# Altium PCB SSFocuser-B-DRV8825-KCTW.PcbDoc
Units mm, origin at the board's own origin, x right, y up, seen from the top; angles counter-clockwise.
Board outline 40 x 49 mm, 2 copper layers (Top Layer, Bottom Layer); 45 components, 39 nets, 212 pads, 39 vias.
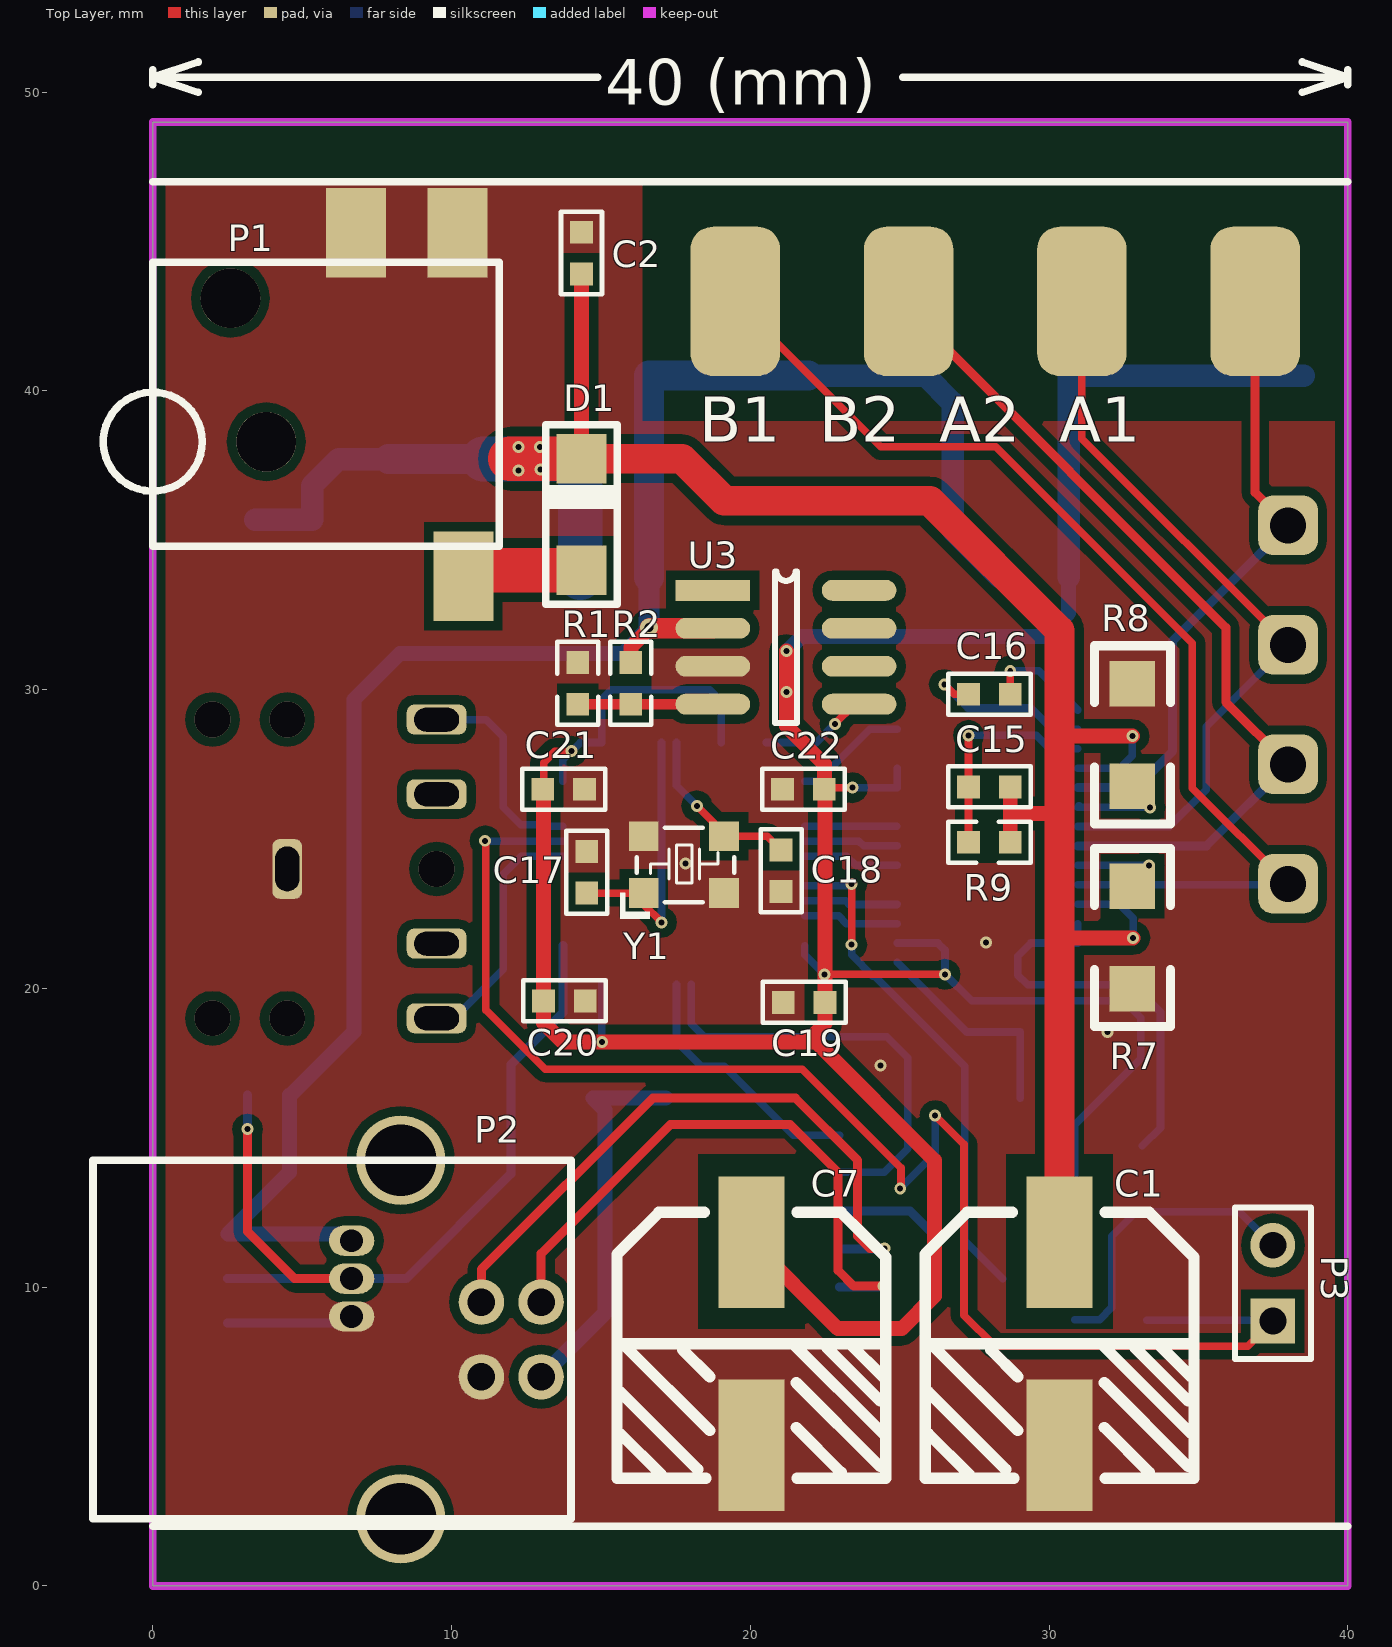
[diagram p0: Top Layer view]
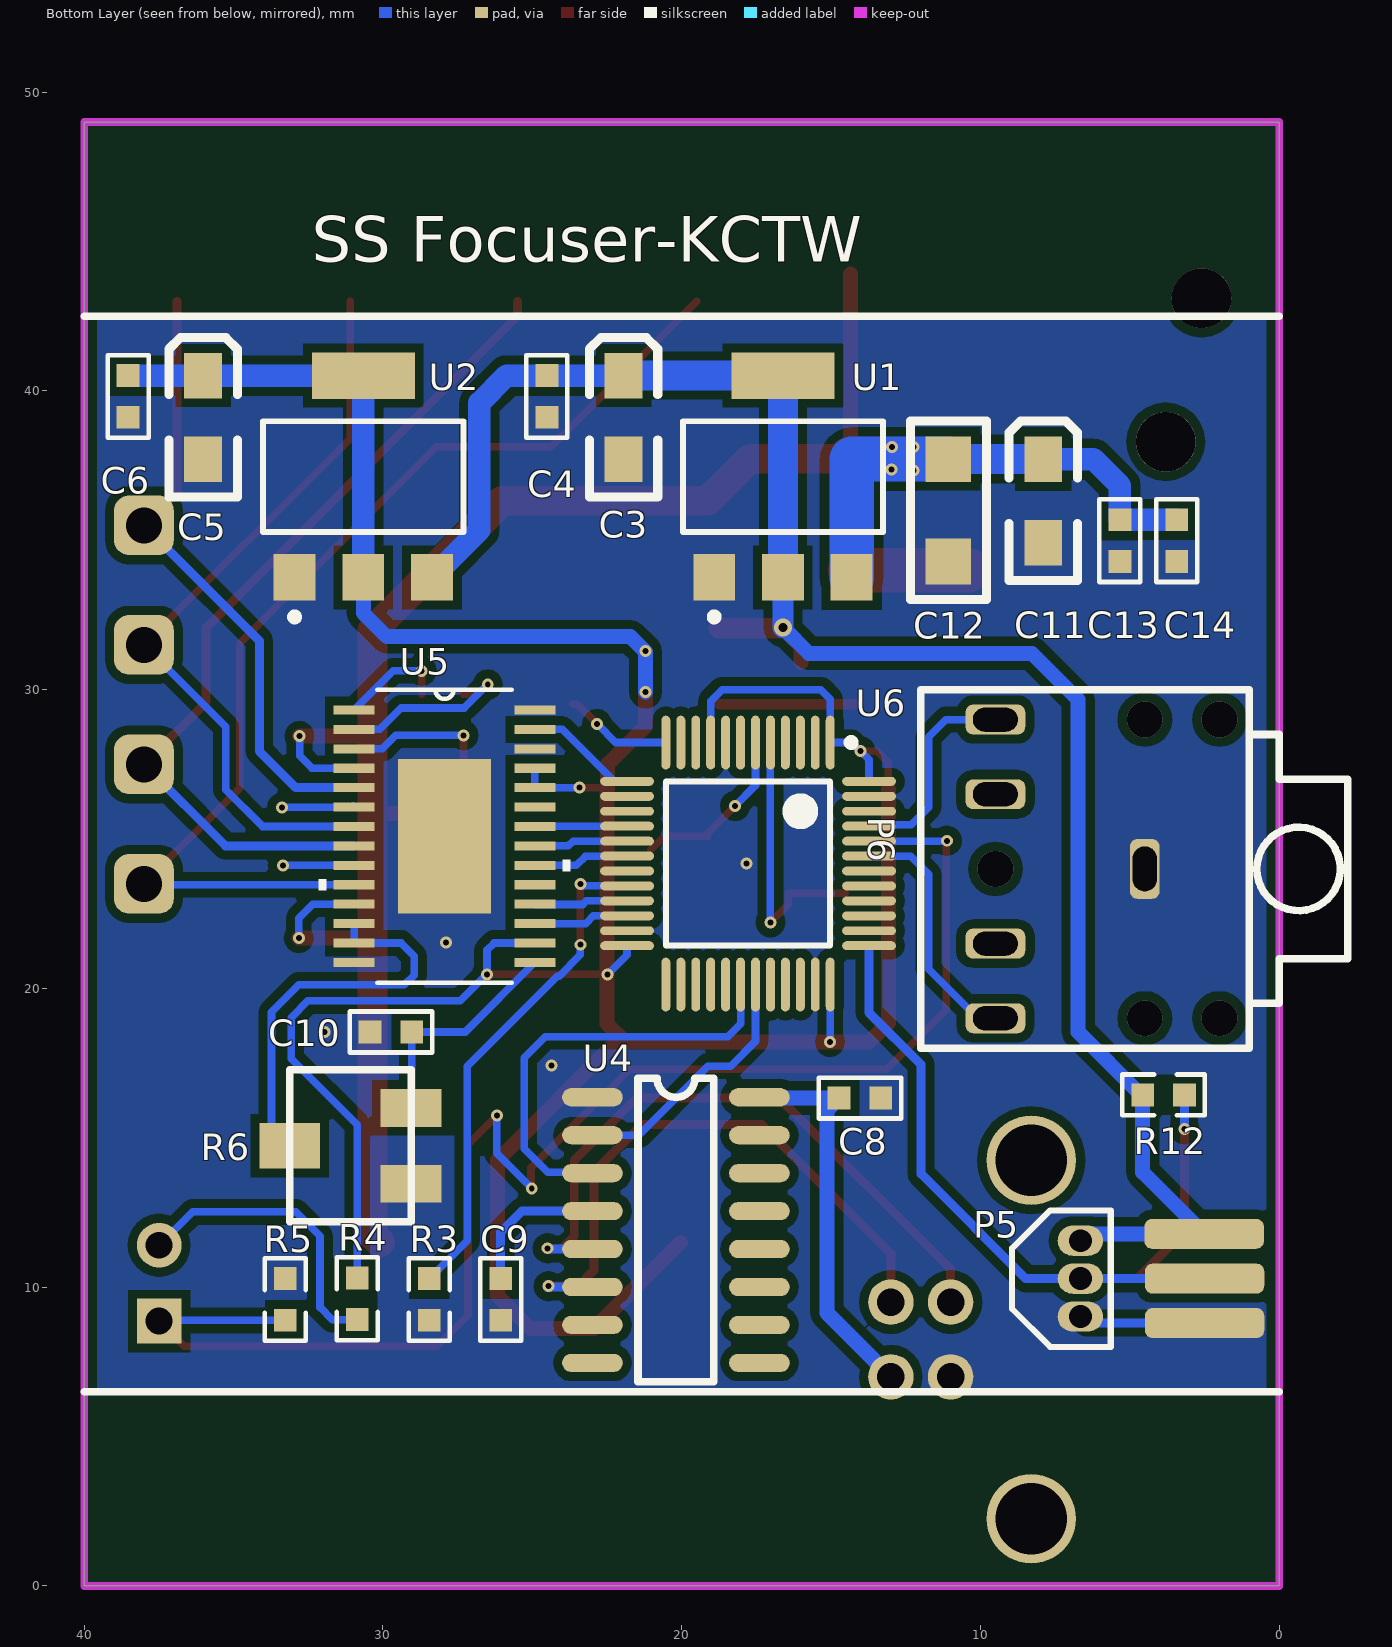
[diagram p1: Bottom Layer view, seen from below]

## Layer stack, top to bottom
Top Solder: solder mask 0.0102, Solder Resist, Dk 3.5
Top Layer: signal copper 0.0356
Dielectric1: dielectric 0.32, FR-4, Dk 4.8
Bottom Layer: signal copper 0.0356
Bottom Solder: solder mask 0.0102, Solder Resist, Dk 3.5

## Board outline
0,0 0,49 40,49 40,0

## Design rules (kind name [scope] priority, off if disabled: settings)
Clearance Clearance_pyog [InPolygon] p1: gap=0.305
Clearance Clearance_mcu [InComponentClass('U7')] p2: gap=0.178
Clearance [All] p3: gap=0.178
HoleSize [All] p1: absolutevalues=TRUE maxlimit=25.4 minlimit=0.025 maxpercent=80.000 minpercent=20.000
MinimumSolderMaskSliver [All] p1: minsoldermaskwidth=0
PolygonConnect GNDVIA [IsVia] p1: connectstyle=Direct reliefconductorwidth=0.254 reliefentries=4 polygonreliefangle="90 Angle" airgapwidth=0.254
PolygonConnect [All] p2: connectstyle=Direct reliefconductorwidth=0.254 reliefentries=4 polygonreliefangle="90 Angle" airgapwidth=0.254
RoutingVias [All] p1: holewidth=0.711 width=1.27 viastyle="Through Hole" minholewidth=0.3 minwidth=0.45 maxholewidth=0.711 maxwidth=1.27
SilkToSilkClearance [All] p1: silktosilkclearance=0
SilkToSolderMaskClearance [IsPad] p1: minsilkscreentomaskgap=0 clearancetoexposedcopper=TRUE
SolderMaskExpansion [All] p1: expansion=0.102
Width [All] p1: maxlimit=2 minlimit=0.254 preferedwidth=0.254
25 further rules are at their usual default settings.

## Components (designator, comment, footprint, x,y, rotation, side; value= is the part's Value field where it differs from the comment)
C1 "470uF" 16V/470U(CD10X10D5) 30.353,8.103 r270 top
C2 "100nF" 0603C 14.351,45.314 r270 top
C3 "10uF" 3216 21.946,40.513 r90 bottom
C4 "100nF" 0603C 24.511,39.116 r90 bottom
C5 "10uF" 3216 36.017,40.513 r90 bottom
C6 "100nF" 0603C 38.532,39.116 r90 bottom
C7 "1000uF" 16V/470U(CD10X10D5) 20.041,8.103 r270 top
C8 "100nF" 0603C 13.335,16.332 r0 bottom
C9 "100nF" 0603C 26.06,8.89 r90 bottom
C10 "0.47uF" 0603C 30.429,18.542 r180 bottom
C11 "10uF" 3216 7.899,37.719 r90 bottom
C12 "4.7uF" 1206C 11.074,37.719 r270 bottom
C13 "100nF" 0603C 5.334,34.29 r90 bottom
C14 "100nF" 0603C 3.429,34.29 r90 bottom
C15 "100nF" 0603C 28.702,26.746 r180 top
C16 "10nF" 0603C 27.305,29.845 r0 top
C17 "20pF" 0603C 14.529,23.19 r90 top
C18 "20pF" 0603C 21.031,24.638 r270 top
C19 "100nF" 0603C 21.107,19.533 r0 top
C20 "100nF" 0603C 14.478,19.583 r180 top
C21 "100nF" 0603C 14.453,26.67 r180 top
C22 "100nF" 0603C 21.082,26.67 r0 top
D1 "M7" DO-214AC 14.351,35.865 r90 top
P1 "SOURCE" DC005 0,34.8 r0 top locked
P2 "USB-B" USB-B 13,7 r0 top locked
P3 "BOOT0" HDR1X2 37.49,8.865 r90 top
P5 "DS18B20" TO-92B 6.655,11.557 r270 bottom
P6 "3F07" 3F07 1,28.5 r0 bottom locked
R1 "2K" 0603R 14.224,29.515 r90 top
R2 "4.7K" 0603R 16.002,29.515 r90 top
R3 "10K" 0603R 28.448,8.89 r90 bottom
R4 "4.7K" 0603R 30.861,8.915 r90 bottom
R5 "10K" 0603R 33.274,8.89 r90 bottom
R6 "RPot" VR_SMD 31.09,14.732 r90 bottom
R7 "0.1Ω" 1206R 32.791,19.99 r90 top
R8 "0.1Ω" 1206R 32.791,30.201 r270 top
R9 "1M" 0603R 27.305,24.892 r0 top
R12 "4.7K" 0603R 3.175,16.434 r0 bottom
U1 "AMS1117-5.0" SOT223 16.612,37.135 r180 bottom locked
U2 "AMS1117-3.3" SOT223 30.658,37.135 r180 bottom locked
U3 "MAX813LCSA" SOP-8 18.745,33.325 r0 top
U4 "CH340C" SO-16 22.987,16.358 r180 bottom locked
U5 "DRV8825" HTSSOP 27.94,25.095 r180 bottom
U6 "STM32F103C8T6" LQFP48_N 17.78,24.181 r0 bottom locked
Y1 "8MHz  无源" X3225 16.459,23.165 r0 top (schematic designator Y2)

## Footprints (in the part's own frame and the unit in brackets; to place one, negate y for a bottom-side part, rotate by r counter-clockwise, add the part's x,y. Pads: shape width x height; smd on the part's side, far side on the other; paste and mask are expansions set on the pad)
3F07 [mm] "EarPhone3.5"
  rrect50% 1x2 hole 0.8 slot 1.5 at 90 deg: 1(3.5,4.5)
  rrect50% 2x1 hole 0.8 slot 1.5 at 0 deg: 2(8.5,9.5) 3(8.5,7) 4(8.5,2) 5(8.5,-0.5)
  silkscreen extent -3.3,-1.5 11,10.5
16V/470U(CD10X10D5) [mm] "取自《FE-3AD》"
  rect 4.4x2.2 smd: 1(-3.4,0) 2(3.4,0)
  Top Layer pour cut-out: -6.35,1.778 -0.508,1.778 -0.508,-1.778 -6.35,-1.778
  silkscreen extent -4.4,-4.5 4.5,4.5
0603C [mil]
  rect 30x30 smd: 1(0,0) 2(55,0)
  silkscreen extent -27,-27 82,27, body extent -4,-16 58,16, height 12
0603R [mil]
  rect 30x30 smd: 1(0,0) 2(55,0)
  silkscreen extent -27,-27 82,27, body extent -4,-18 58,16, height 18
1206C [mil]
  rect 60x60 smd: 1(0,0) 2(135,0)
  silkscreen extent -50,-50 185,50, body extent 6,-33 132,29, height 40
1206R [mil]
  rect 60x60 smd: 1(0,0) 2(135,0)
  silkscreen extent -50,-50 185,50, body extent 5,-32 131,30, height 22
3216 [mil]
  rect 60x50 smd: 1(0,0) 2(-110,0)
  silkscreen extent -160,-45 50,45, body extent -151,-35 38,36, height 73
DC005 [mm] "贴片5.5-2.1"
  rect 2x3 smd: 1(10.4,-1) 2(10.2,10.5) 3(6.8,10.5)
  round 2 hole 2: 5(2.6,8.3) 5(3.8,3.5)
  silkscreen extent -1.65,0 11.6,9.5
DO-214AC [mm]
  rect 1.655x1.67 smd: 1(1.865,0) 2(-1.865,0)
  silkscreen extent -3,-1.2 3,1.2, body extent -2.74,-1.4 2.74,1.4, height 2.3
HDR1X2 [mm] "Connector; Header; 2 Position"
  rect 1.5x1.5 hole 0.9: 1(0,0)
  round 1.5 hole 0.9: 2(2.54,0)
  silkscreen extent -1.27,-1.27 3.81,1.27, body extent -1.27,-1.27 3.81,1.27, height 7.58
HTSSOP [mil]
  rect 54x12 smd: 1(-119,166.34) 2(-119,140.75) 3(-119,115.16) 4(-119,89.57) 5(-119,63.98) 6(-119,38.39) 7(-119,12.8) 8(-119,-12.8) 9(-119,-38.39) 10(-119,-63.98) 11(-119,-89.57) 12(-119,-115.16) 13(-119,-140.75) 14(-119,-166.34) 15(119,-166.34) 16(119,-140.75) 17(119,-115.16) 18(119,-89.57) 19(119,-63.98) 20(119,-38.39) 21(119,-12.8) 22(119,12.8) 23(119,38.39) 24(119,63.98) 25(119,89.57) 26(119,115.16) 27(119,140.75) 28(119,166.34)
  rect 122.05x203.94 smd: 29(0,0)
  silkscreen extent -166,-193 166,193, body extent -133,-191 120,191, height 40
LQFP48_N [mm]
  oval 0.3x1.8 smd: 1(-2.75,-4.05) 2(-2.25,-4.05) 3(-1.75,-4.05) 4(-1.25,-4.05) 5(-0.75,-4.05) 6(-0.25,-4.05) 7(0.25,-4.05) 8(0.75,-4.05) 9(1.25,-4.05) 10(1.75,-4.05) 11(2.25,-4.05) 12(2.75,-4.05) 25(2.75,4.05) 26(2.25,4.05) 27(1.75,4.05) 28(1.25,4.05) 29(0.75,4.05) 30(0.25,4.05) 31(-0.25,4.05) 32(-0.75,4.05) 33(-1.25,4.05) 34(-1.75,4.05) 35(-2.25,4.05) 36(-2.75,4.05)
  oval 1.8x0.3 smd: 13(4.05,-2.75) 14(4.05,-2.25) 15(4.05,-1.75) 16(4.05,-1.25) 17(4.05,-0.75) 18(4.05,-0.25) 19(4.05,0.25) 20(4.05,0.75) 21(4.05,1.25) 22(4.05,1.75) 23(4.05,2.25) 24(4.05,2.75) 37(-4.05,2.75) 38(-4.05,2.25) 39(-4.05,1.75) 40(-4.05,1.25) 41(-4.05,0.75) 42(-4.05,0.25) 43(-4.05,-0.25) 44(-4.05,-0.75) 45(-4.05,-1.25) 46(-4.05,-1.75) 47(-4.05,-2.25) 48(-4.05,-2.75)
  silkscreen extent -3.57,-4.17 2.75,2.75, body extent -4.5,-4.5 4.5,4.5, height 1.5
SO-16 [mil]
  oval 80x24 smd: 1(0,0) 2(0,-50) 3(0,-100) 4(0,-150) 5(0,-200) 6(0,-250) 7(0,-300) 8(0,-350) 9(220,-350) 10(220,-300) 11(220,-250) 12(220,-200) 13(220,-150) 14(220,-100) 15(220,-50) 16(220,0)
  silkscreen extent 60,-375 160,25, body extent -12,-377 226,29, height 77
SOP-8 [mm]
  rect 2.5x0.7 smd: 1(0,0)
  oval 2.5x0.7 smd: 2(0,-1.27) 3(0,-2.54) 4(0,-3.81) 5(4.9,-3.81) 6(4.9,-2.54) 7(4.9,-1.27) 8(4.9,0)
  silkscreen extent 2.08,-4.44 2.82,0.64, body extent -0.56,-4.44 5.48,0.58, height 1.6
SOT223 [mm] "SOT-223/SC-73; 4 Leads; Body 6.7 x 7.3 mm, inc. leads (LxW max)"
  rect 1.4x1.55 smd: 1(-2.3,-3.375) 2(0,-3.375) 3(2.3,-3.375)
  rect 3.45x1.55 smd: 4(0,3.375)
  silkscreen extent -3.35,-4.82 3.35,1.85, body extent -3.25,-3.53 3.25,3.43, height 1.7
TO-92B [mil]
  oval 40x60 hole 30: 1(0,0) 2(50,0) 3(100,0)
  silkscreen extent -40,-90 140,40
USB-B [mm]
  round 1.524 hole 0.92: 1(0,0) 2(0,2.5) 3(-2,2.5) 4(-2,0)
  round 3 hole 2.4: 5(-4.7,7.25) 6(-4.7,-4.75)
  silkscreen extent -15,-4.75 1,7.25
VR_SMD [mil]
  rect 50x80 smd: 1(-50,-80) 2(50,-80)
  rect 60x80 smd: 3(0,80)
  silkscreen extent -100,-80 100,80
X3225 [mm]
  rect 1x1 smd: 1(-0.025,0.025) 2(2.667,0.025) 3(2.667,1.93) 4(-0.025,1.93)
  silkscreen extent -0.81,-0.84 3,2.21, body extent -0.23,-0.29 2.97,2.21, height 0.72

## Part data
C1: library part C470UF016S, "470UF      16V      CD10X10D5"
C2 C4 C6 C8 C10 C12 C13 C14 C15 C16 C17 C18 C19 C20 C21 C22: library part Cap, "Capacitor"
C3 C5 C7 C11: library part CAP2
C9: library part C
D1: library part Diode, "High Conductance Fast Diode"
P3: library part MHDR1X2, "Header, 2-Pin"
P5: library part "Header 3", "Header, 3-Pin"
P6: "EarPhone3.5"
R1 R2 R5 R7 R8 R12: library part RES, "Resistor"
R3 R4 R9: library part R
R6: "Potentiometer"
U1 U2: library part AMS1117
U3: library part MAX813L
U4: library part CH340G, "USB2UART"
U6: "STM32 ARM-based 32-bit MCU Performance Line with 64 kB Flash, 20 kB Internal RAM, -40 to +85癈 Temperature, 48-Pin LQFP, Tray"
Y1: library part XTAL_1, "Crystal Oscillator"

## Free pads (board coordinates)
  rrect50% 4x1 smd far side: 0(2.5,8.8) 0(2.5,10.287) 0(2.515,11.786)
  rrect50% 3x5 smd: 0(19.5,43) 0(25.3,43) 0(31.1,43) 0(36.9,43)
  rrect50% 2x2 hole 1.2: 0(38,23.5) 0(38,27.5) 0(38,31.5) 0(38,35.5)

## Via types
v1: diameter 0.4, hole 0.2, Top Layer to Bottom Layer, 33 vias
v2: diameter 1.2, hole 1.2, Top Layer to Bottom Layer, 5 vias
v3: diameter 0.6, hole 0.3, Top Layer to Bottom Layer, 1 vias

## Nets (pads, with @x,y where several pads share a name; then routed paths per layer and width w, separated by ;. In a path a pad name is that pad's centre, name@x,y a point inside that pad or via, vN(x,y) a via of type N, cw(c..) or ccw(c..) an arc to the next point about the centre after c; other vN are vias at no path point)
A1: pad.0@36.9,43 pad.0@38,35.5 U5.5 | length 20.8
  Top Layer w0.3: pad.0@36.9,43 36.9,36.6 pad.0@38,35.5
  Bottom Layer w0.3: U5.5 32.918,26.72 34.138,27.94 34.138,31.638 pad.0@38,35.5
A2: pad.0@31.1,43 pad.0@38,31.5 U5.7 | length 25.2
  Top Layer w0.254: pad.0@31.1,43 31.1,38.4 pad.0@38,31.5
  Bottom Layer w0.254: U5.7 34.031,25.42 35.255,26.645 35.255,28.755 pad.0@38,31.5
B1: pad.0@19.5,43 pad.0@38,23.5 U5.10 | length 36.5
  Top Layer w0.254: pad.0@19.5,43 24.375,38.125 28.219,38.125 34.798,31.547 34.798,26.702 pad.0@38,23.5
  Bottom Layer w0.254: U5.10 pad.0@38,23.47
B2: pad.0@25.3,43 pad.0@38,27.5 U5.8 | length 28.8
  Top Layer w0.3: pad.0@25.5,43 25.5,42.496 35.916,32.08 35.916,29.584 pad.0@38,27.5
  Bottom Layer w0.3: U5.8 35.27,24.77 pad.0@38,27.5
BOOT0: P3.1 R5.1 U6.44 | length 50.3
  Top Layer w0.254: v1@11.151,24.917 11.151,19.279 13.132,17.297 21.742,17.297 25.044,13.995 v1@25.044,13.284 ; v1@26.213,15.723 27.153,14.783 27.153,9.068 28.194,8.026 36.652,8.026 P3.1
  Bottom Layer w0.254: v1@11.137,24.931 U6.44 ; v1(25.019,13.31) 26.187,14.478 v1(26.187,15.748) ; R5.1 P3.1@37.465,8.89
  other v1: 11.125,24.943
BOOT1: R3.2 U6.20 | length 17
  Top Layer w0.254: v1(23.393,21.463) v1(23.393,23.495)
  Bottom Layer w0.254: U6.20 23.329,23.431 v1(23.393,23.495) ; v1(23.393,21.463) 23.444,21.463 23.393,21.412 23.393,21.125 24.105,20.413 24.164,20.413 27.178,17.399 27.178,11.557 R3.2
D3V3: C5.1 C6.2 C7.1 C19.2 C20.2 C21.2 C22.2 R4.2 U2.2 U2.4 U5.16 U5.24 U5.25 U6.1 U6.9 U6.24 U6.36 U6.48 | length 117.1
  Top Layer w0.254: C21.2@13.081,26.67 13.081,27.559 13.462,27.94 v1(14.021,27.94) ; v1(22.479,20.472) 22.504,20.472 v1(26.518,20.472) v1@26.568,20.472 ; C22.2@22.504,26.645 22.58,26.72 v1(23.419,26.72)
  Top Layer w0.5: C21.2@13.081,26.67 C20.2 13.081,18.847 13.716,18.212 v1(15.037,18.212) 21.895,18.212 ; C7.1 22.933,8.611 25.07,8.611 26.162,9.703 26.162,14.249 22.2,18.212 21.895,18.212 ; v1(21.209,31.293) 21.209,28.778 22.479,27.508 C22.2 ; v1@22.504,20.447 C19.2 22.504,18.821 21.895,18.212 ; v1@22.504,20.472 C22.2@22.504,26.645
  Bottom Layer w0.254: U6.48 13.73,27.649 v1(14.021,27.94) 14.312,28.231 U6.1 15.03,29.686 15.342,29.997 18.644,29.997 19.03,29.611 U6.9 ; v1@15.03,18.219 U6.36 ; U6.24 21.83,21.121 v1(22.479,20.472) ; v1(23.419,26.72) U5.24 U5.25 ; U5.16 26.283,21.52 26.518,21.285 v1(26.518,20.472) 27.407,19.583 32.512,19.583 33.071,19.025 33.071,17.653 30.861,15.443 R4.2
  Bottom Layer w0.5: v1(21.209,29.921) 21.209,31.267 21.717,31.775 29.87,31.775 30.658,32.563 U2.2
  Bottom Layer w0.75: U2.2 U2.4 C6.2@38.529,40.51
D5V0: C3.1 C4.2 P5.1 pad.0@2.515,11.786 R2.2 R12.2 U1.2 U1.4 U2.3 U3.2 | length 63.7
  Top Layer w0.5: R2.2 16.002,31.42 v3@16.637,32.055
  Top Layer w0.7: v3@16.637,32.055 U3.2
  Bottom Layer w0.5: R12.2 4.572,13.843 2.515,11.786 6.426,11.786 P5.1 ; R12.2@4.597,16.408 6.731,18.542 6.731,29.667 8.28,31.217 15.748,31.217 v3(16.612,32.08)
  Bottom Layer w0.7: v3(16.612,32.08) U1.2
  Bottom Layer w0.75: C3.1@21.942,40.51 C4.2@24.508,40.51 ; C4.2 25.857,40.513 26.772,39.599 26.772,35.346 U2.3
  Bottom Layer w1: U1.2 U1.4 C3.1@21.942,40.51
D12V0: C1.1 C2.2 C11.1 C12.1 C13.2 C14.2 C15.1 D1.1 R9.2 U1.3 U5.4 U5.11 | length 77.4
  Top Layer w0.5: D1.1 C2.2 ; R9.2 28.702,25.857 ; C15.1 28.702,25.857 ; 30.099,25.857 28.702,25.857 ; 30.353,21.692 v1(32.817,21.692) ; 30.353,28.448 v1(32.791,28.448)
  Top Layer w1: D1.1 17.718,37.73 19.126,36.322 26.01,36.322 30.353,31.979 30.353,11.757 C1.1@30.099,11.503
  Top Layer w1.5: 11.963,37.73 D1.1
  Bottom Layer w0.254: U5.11 32.349,22.82 32.817,22.352 v1(32.817,21.692) ; U5.4 32.374,27.37 32.791,27.788 v1(32.791,28.448)
  Bottom Layer w0.75: C14.2 C13.2 5.334,36.83 6.223,37.719 C11.1
  Bottom Layer w1: C11.1 C12.1
  Bottom Layer w1.5: C12.1 14.3,37.719 14.312,37.708 U1.3
  other v1: 12.243,37.338 12.979,37.363 12.243,38.125 12.954,38.125
DIR: U5.20 U6.18 | length 3.2
  Bottom Layer w0.254: U6.18 23.22,24.431 23.53,24.12 U5.20
DOWN: P6.2 U6.43 | length 8.3
  Bottom Layer w0.254: P6.2 10.085,19 11.735,20.65 11.735,23.825 12.34,24.431 U6.43
EN: U5.21 U6.17 | length 3.2
  Bottom Layer w0.254: U6.17 23.634,24.931 23.795,24.77 U5.21
FLT: U5.18 U6.21 | length 3.1
  Bottom Layer w0.254: U6.21 23.196,22.931 23.317,22.809 24.906,22.809 U5.18
GND: C1.2 C2.1 C3.2 C4.1 C5.2 C6.1 C7.2 C8.1 C9.1 C10.1 C11.2 C12.2 C13.1 C14.1 C17.2 C18.2 C19.1 C20.1 C21.1 C22.1 P1.2 P1.3 P2.4 P5.3 P6.1 pad.0@2.5,8.8 R1.2 R3.1 R5.2 R6.1 R7.1 R8.1 U1.1 U2.1 U3.3 U4.1 U5.14 U5.26 U5.28 U5.29 U6.8 U6.23 U6.35 U6.47 Y1.2 Y1.4 | length 4.2
  Bottom Layer w0.3: pad.0@2.5,8.8 6.438,8.8 P5.3
  other v1: 24.359,17.424 31.953,18.542 27.889,21.539 17.831,24.181
HOME: U5.27 U6.13 | length 3.8
  Bottom Layer w0.254: U6.13 22.257,26.931 23.997,28.67 U5.27
NetC9_2: C9.2 U4.4 | length 4.9
  Bottom Layer w0.3: U4.4 25.349,12.548 26.06,11.836 C9.2
NetC15_2: C15.2 R9.1 U5.3 | length 7.4
  Top Layer w0.254: R9.1 C15.2 v1(27.305,28.473)
  Bottom Layer w0.254: v1(27.305,28.473) 29.566,28.473 30.019,28.02 U5.3
NetC16_1: C16.1 U5.2 | length 6
  Top Layer w0.254: v1(26.492,30.175) 26.822,29.845 C16.1
  Bottom Layer w0.254: v1(26.492,30.175) 27.28,29.388 29.388,29.388 30.105,28.67 U5.2
NetC16_2: C16.2 U5.1 | length 3.6
  Top Layer w0.254: C16.2 v1(28.702,30.632)
  Bottom Layer w0.254: v1(28.702,30.632) 29.65,30.632 U5.1
NetD1_1: D1.2 P1.1 | length 4
  Top Layer w1.5: P1.1@10.4,34 D1.2
NetP2_2: P2.2 U4.6 | length 20.5
  Top Layer w0.3: P2.2 13,11.12 17.323,15.443 21.336,15.443 22.936,13.843 22.936,10.566 23.47,10.033 v1(24.46,10.033)
  Bottom Layer w0.3: U4.6 v1@24.486,10.008
NetP2_3: P2.3 U4.5 | length 22.1
  Top Layer w0.3: P2.3 11,10.594 16.739,16.332 21.514,16.332 23.597,14.249 23.597,11.709 24.003,11.303 v1(24.486,11.303)
  Bottom Layer w0.3: U4.5 v1@24.511,11.278
NetP3_2: P3.2 R4.1 | length 10
  Bottom Layer w0.254: R4.1 31.699,8.915 32.106,9.322 32.106,11.709 32.918,12.522 36.373,12.522 P3.2
NetR1_1: R1.1 R2.1 U3.4 | length 4.5
  Top Layer w0.35: R1.1 R2.1 U3.4
NetR6_3: R6.3 U5.12 U5.13 | length 13.5
  Bottom Layer w0.254: U5.12 U5.13 29.394,21.52 28.956,21.082 28.956,20.447 29.286,20.117 32.817,20.117 33.731,19.202 33.731,15.342 R6.3
NetR7_2: R7.2 U5.9 | length 2.4
  Bottom Layer w0.254: U5.9 v1(33.35,24.12)
NetR8_2: R8.2 U5.6 | length 2.5
  Bottom Layer w0.254: U5.6@31.004,26.111 U5.6 v1@33.366,26.07
  other v1: 33.376,26.06
OSC_IN: C17.1 U6.5 Y1.1 | length 9.1
  Top Layer w0.254: C17.1 Y1.1 16.434,22.808 v1(17.03,22.212)
  Bottom Layer w0.254: v1(17.03,22.212) U6.5
OSC_OUT: C18.1 U6.6 Y1.3 | length 5.9
  Top Layer w0.254: v1(18.212,26.111) 19.126,25.197 Y1.3 20.574,25.095 C18.1
  Bottom Layer w0.254: U6.6 17.53,26.793 v1(18.212,26.111)
PFO: U3.5 U6.12 | length 3.6
  Top Layer w0.254: v1(22.835,28.854) 23.495,29.515 U3.5
  Bottom Layer w0.254: U6.12 22.211,28.231 v1(22.835,28.854)
RESET: U6.7
RXD: U4.3 U6.30 | length 14.7
  Bottom Layer w0.254: U6.30 18.03,18.825 18.466,18.39 24.562,18.39 25.273,17.678 25.273,14.63 24.486,13.843 U4.3@23.012,13.843
SLP: U5.17 U6.22 | length 3.2
  Bottom Layer w0.254: U6.22 22.959,22.431 23.22,22.17 U5.17
STEP: U5.22 U6.16 | length 3.1
  Bottom Layer w0.254: U6.16 U5.22@24.907,25.431
TEMP: P5.2 pad.0@2.5,10.287 R12.1 U6.37 | length 28
  Top Layer w0.305: v1(3.175,15.291) 3.175,11.862 4.75,10.287 P5.2
  Bottom Layer w0.305: pad.0@2.5,10.287 P5.2 8.484,10.287 11.989,13.792 11.989,17.45 13.73,19.191 U6.37 ; v1(3.175,15.291) R12.1
TXD: U4.2 U6.31 | length 8.7
  Bottom Layer w0.254: U6.31 17.53,18.233 18.364,17.399 19.126,17.399 21.438,15.088 U4.2
UP: P6.5 U6.45 | length 7.1
  Bottom Layer w0.254: P6.5 11.157,29 11.735,28.423 11.735,26.06 12.319,25.476 13.024,25.476 13.069,25.431 U6.45
V3.3: C10.2 R6.2 U5.15 | length 7.3
  Bottom Layer w0.254: U5.15 27.246,18.542 C10.2 R6.2@29.032,16.332
VBUS: C8.2 P2.1 U4.16 | length 12.8
  Bottom Layer w0.508: P2.1 15.138,9.138 15.138,15.926 C8.2 U4.16@17.17,16.332
pads on no net: P1.5 P2.5 P2.6 P6.3 P6.4 U3.1 U3.6 U3.7 U3.8 U4.7 U4.8 U4.9 U4.10 U4.11 U4.12 U4.13 U4.14 U4.15 U5.19 U5.23 U6.2 U6.3 U6.4 U6.10 U6.11 U6.14 U6.15 U6.19 U6.25 U6.26 U6.27 U6.28 U6.29 U6.32 U6.33 U6.34 U6.38 U6.39 U6.40 U6.41 U6.42 U6.46
copper on no net:
  other v2: 2,19 4.5,19 9.5,24 2,29 4.5,29

## Polygon pours and split planes (outlines as drawn)
GND on Bottom Layer "Bottom Layer-No Net" (solid, remove dead copper, pour order 16): 0,6.528 39.853,6.528 39.929,6.452 39.929,42.545 0,42.545
GND on Top Layer "Bottom Layer-No Net" (solid, remove dead copper, pour order 20): 0,2.083 39.898,2.083 40,1.981 40,47.015 0.025,47.015 0,46.99

## Keep-outs
Keep-Out Layer:
  the board outline again, w0.254

## Other copper
Top Layer:
  pour cut-out: 16.383,38.989 40.005,38.989 40.005,48.995 40,49 39.971,48.971 16.383,49

## Silkscreen, mask and mechanical layers (free items; w line width, h text height)
Top Overlay:
  lines w0.254: 0,2 40,2 ; 0,47 40,47 ; 0,50.246 0,50.754 ; 1.524,49.992 0,50.5 ; 1.524,51.008 0,50.5 ; 14.896,50.5 0,50.5 ; 25.104,50.5 40,50.5 ; 38.476,49.992 40,50.5 ; 38.476,51.008 40,50.5 ; 40,50.246 40,50.754
  text "40 (mm)" at 15.15,49.586 h1.52
  text "B1  B2  A2  A1" at 18.292,38.304 h1.5
Bottom Overlay:
  lines w0.254: 0,6.5 40,6.5 ; 0,42.5 40,42.5
  text "SS Focuser-KCTW" at 32.385,44.323 h1.52

## Dimensions
40,49 to 40,0 on Top Overlay